# Altium PCB pi_breakout.PcbDoc
Units mm, origin at the board's own origin, x right, y up, seen from the top; angles counter-clockwise.
Board outline 56.1 x 70 mm, 2 copper layers (Top Layer, Bottom Layer); 56 components, 55 nets, 226 pads, 69 vias.
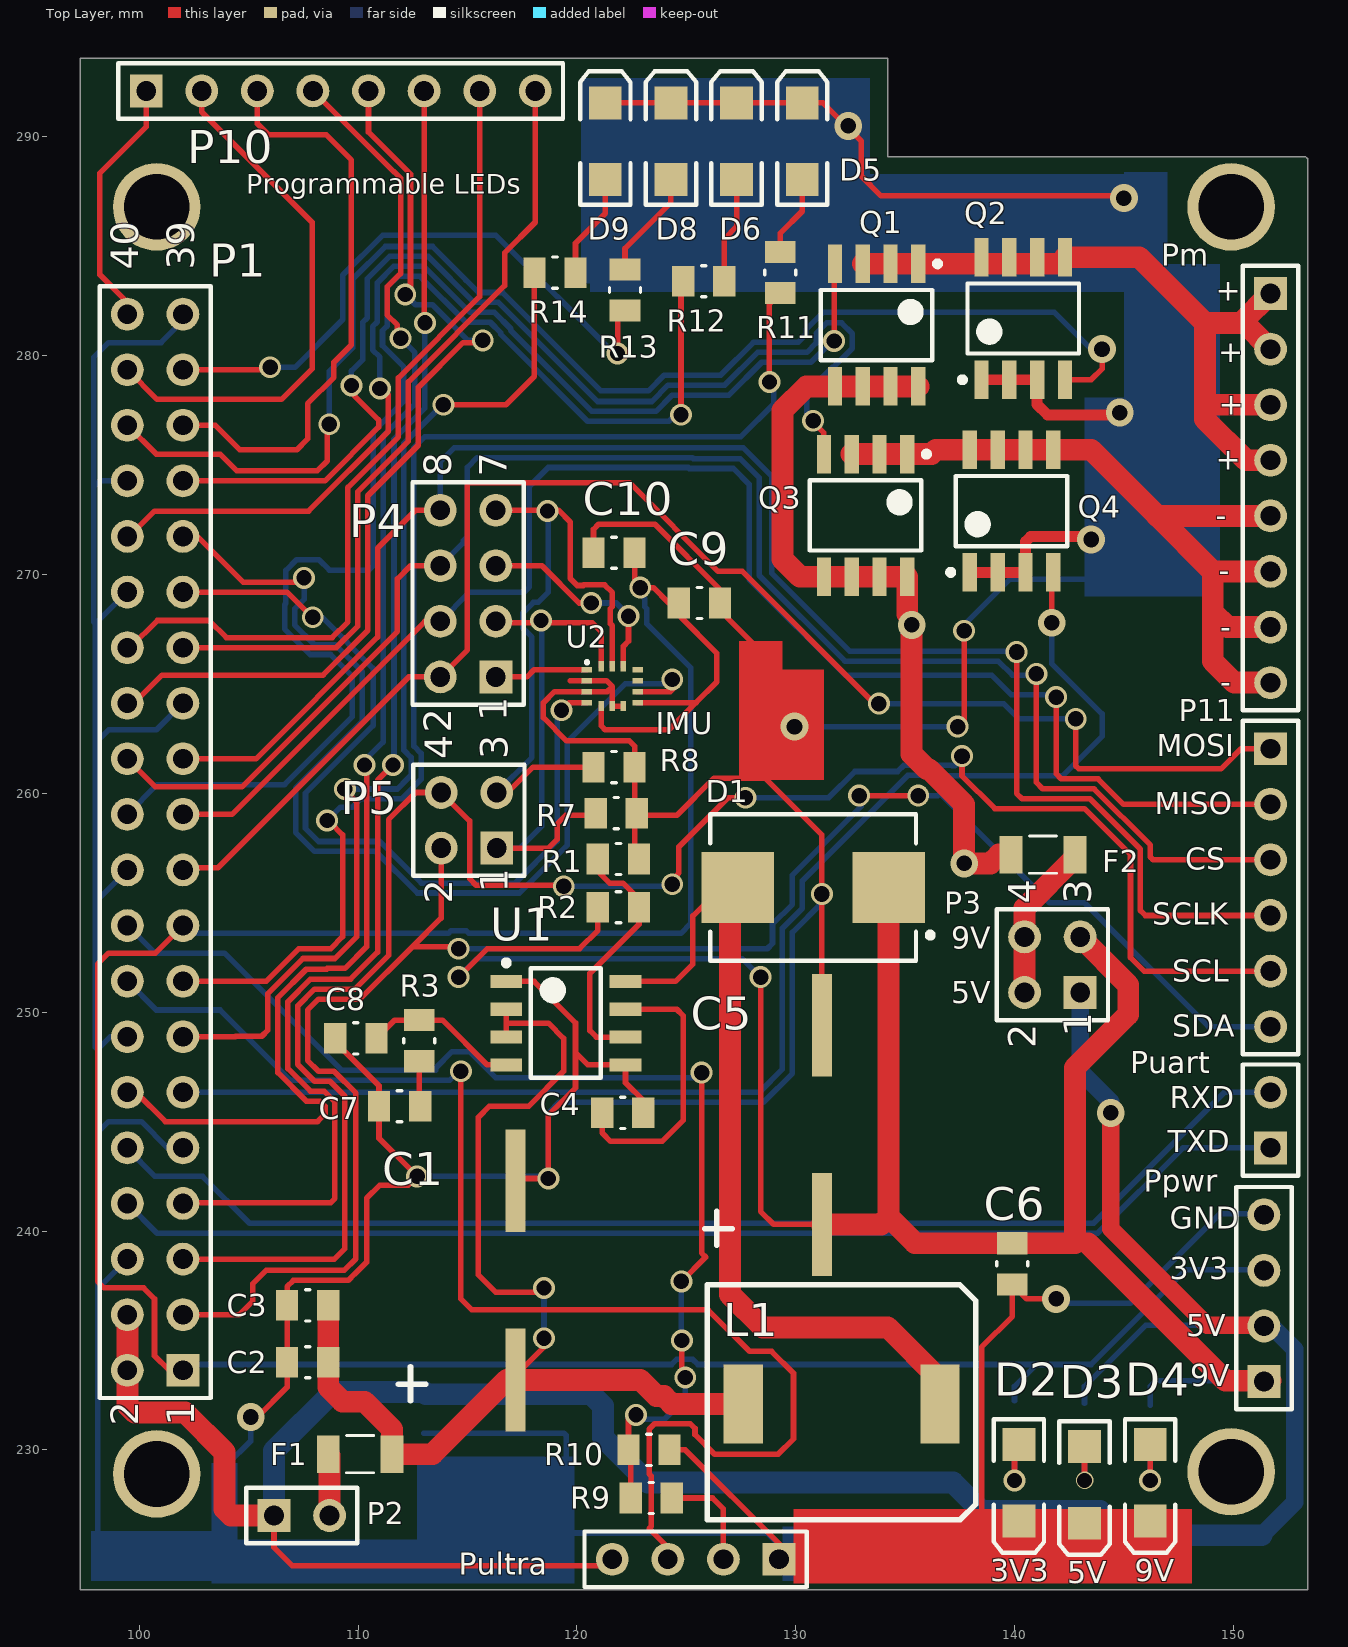
[diagram p0: Top Layer view]
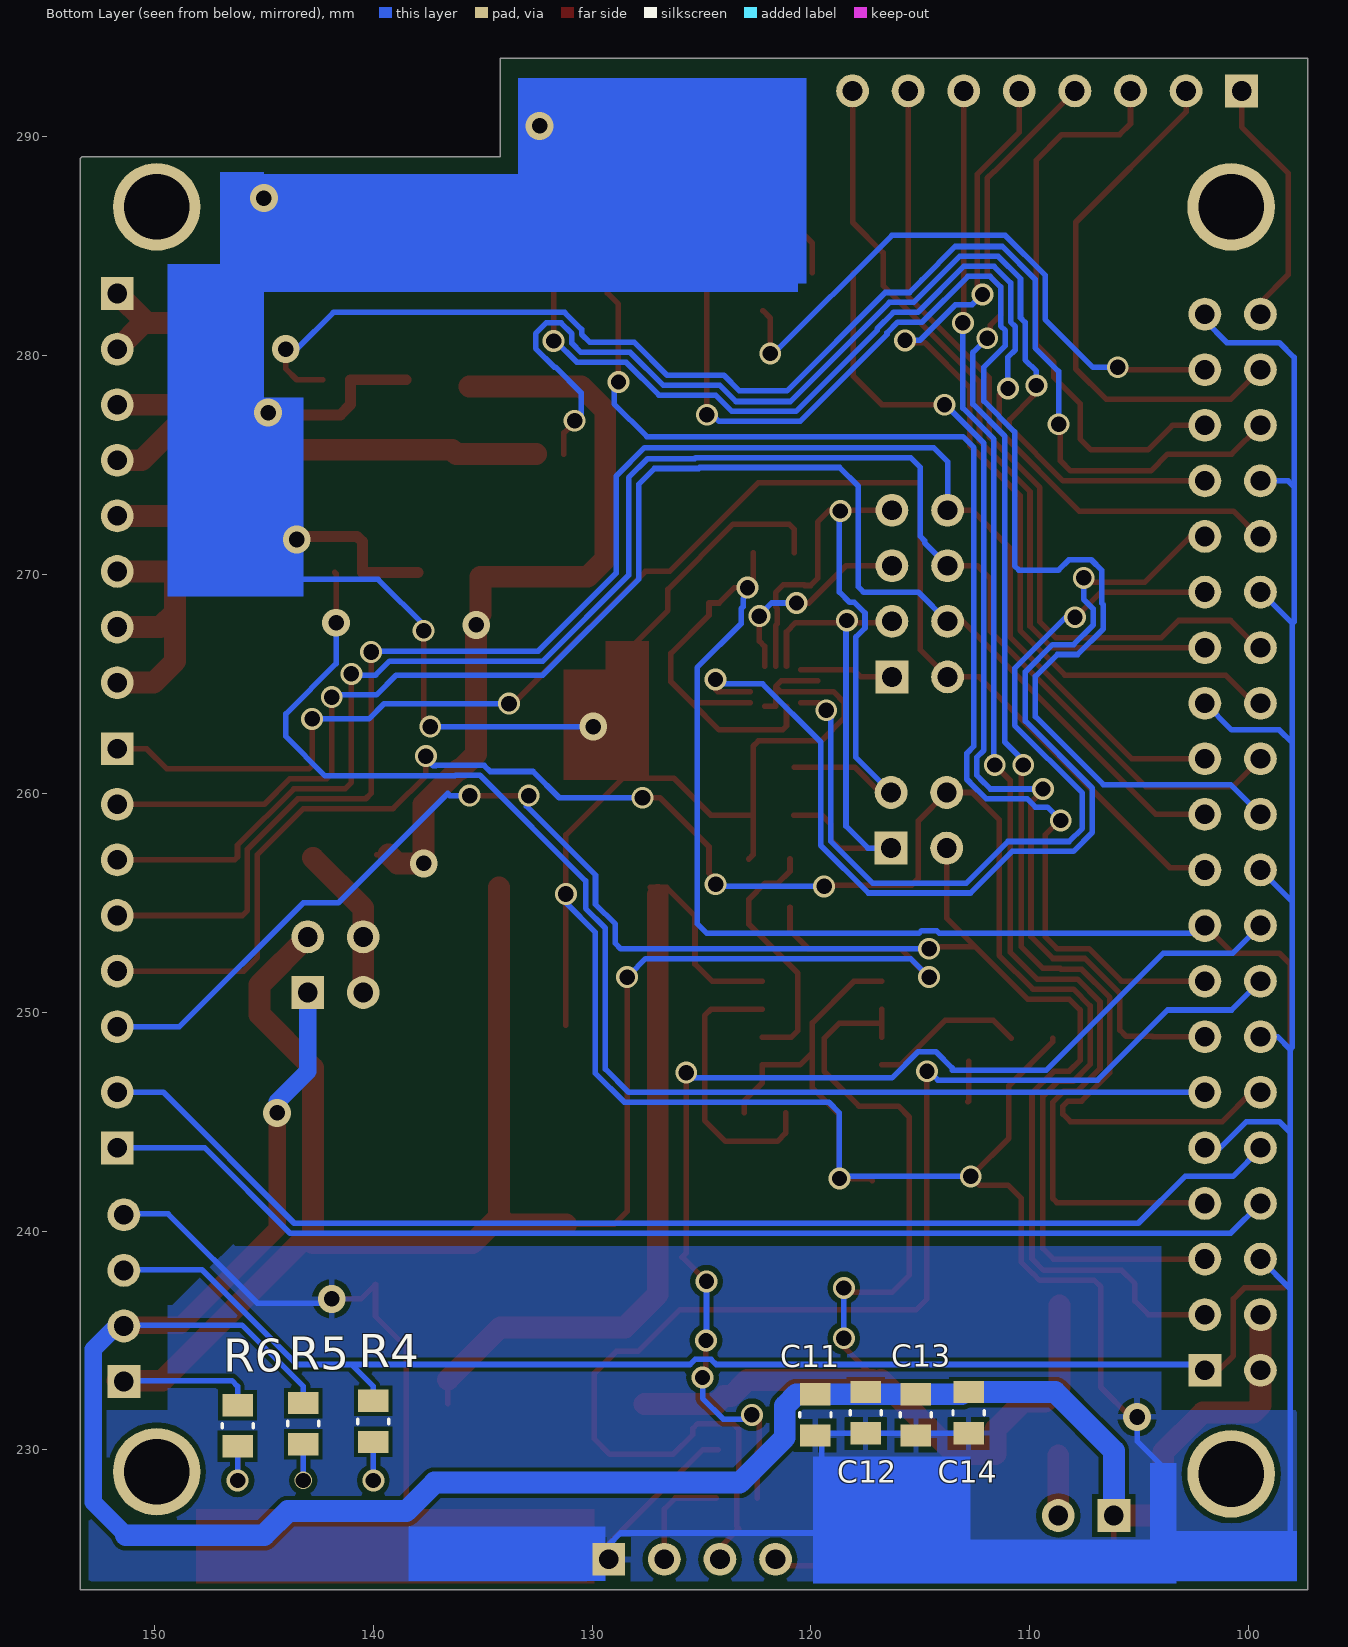
[diagram p1: Bottom Layer view, seen from below]

## Layer stack, top to bottom
Top Solder: solder mask 0.0102, Solder Resist, Dk 3.5
Top Layer: signal copper 0.0356
Dielectric 1: dielectric 0.32, FR-4, Dk 4.8
Bottom Layer: signal copper 0.0356
Bottom Solder: solder mask 0.0102, Solder Resist, Dk 3.5

## Board outline
97.3,293.6 97.3,223.6 153.4,223.6 153.4,289 153.3,289.1 134.2,289.1 134.2,293.6
cut-out: 62.061,252.631

## Design rules (kind name [scope] priority, off if disabled: settings)
Clearance [All] p1: gap=0.2 ignorepadtopadclearanceinfootprint=FALSE except(0: Arc-Hole Track-Hole SMDPad-Hole THPad-Hole Via-Hole Fill-Hole Poly-Hole Region-Hole Text-Hole; 0.254: THPad-THPad THPad-Via THPad-Fill THPad-Poly THPad-Region THPad-Text Via-Via Via-Fill Via-Poly Via-Region Via-Text Fill-Fill Fill-Poly Fill-Region Fill-Text Poly-Poly Poly-Region Poly-Text Region-Region Region-Text Text-Text)
HoleSize [All] p1: absolutevalues=TRUE maxlimit=4 minlimit=0.025 maxpercent=80.000 minpercent=20.000
MinimumSolderMaskSliver [All] p1: minsoldermaskwidth=0.14
PolygonConnect [All] p1: connectstyle=Relief reliefconductorwidth=0.254 reliefentries=4 polygonreliefangle="90 Angle" airgapwidth=0.254
RoomDefinition pi_breakout [InComponentClass('pi_breakout')] p1: confinementstyle=ConfineIn formatcopy=TRUE lockcomponents=FALSE outline 97.3,293.7 153.2,293.7 153.4,293.5 153.4,223.5 97.3,223.5
RoutingVias [All] p1: holewidth=0.711 width=1.27 viastyle="Through Hole" minholewidth=0.7 minwidth=0.7 maxholewidth=4 maxwidth=4
SilkToSilkClearance [All] p1: silktosilkclearance=0.15
SilkToSolderMaskClearance [IsPad] p1: minsilkscreentomaskgap=0.15 clearancetoexposedcopper=TRUE
SolderMaskExpansion [All] p1: expansion=0.102
Width [All] p1: maxlimit=3 minlimit=0.254 preferedwidth=0.254
26 further rules are at their usual default settings.

## Components (designator, comment, footprint, x,y, rotation, side; value= is the part's Value field where it differs from the comment)
C1 "CAP ALUM 470UF RADIAL" "Aluminum Electrolytic Capacitors Radial" 117.2,233.2 r0 top value=470uF
C2 "10uF" 0805 107.7,234 r0 top
C3 "1uF" 0805 107.7,236.6 r0 top
C4 "10nF" 0805 122.1,245.4 r0 top
C5 "CAP ALUM 470UF RADIAL" "Aluminum Electrolytic Capacitors Radial" 131.2,240.3 r0 top value=470uF
C6 "10uF" 0805 139.9,238.5 r90 top
C7 "1nF" 0805 111.9,245.7 r0 top
C8 "470pF" 0805 109.9,248.8 r0 top
C9 "100nF" 0805 125.599,268.699 r0 top
C10 "100nF" 0805 121.7,271 r0 top
C11 "1uF" 0805 119.8,231.6 r90 bottom
C12 "1uF" 0805 117.5,231.7 r90 bottom
C13 "1uF" 0805 115.209,231.6 r90 bottom
C14 "1uF" 0805 112.8,231.7 r90 bottom
D1 "DIODE SCHOTTKY 40V 3A SMC" SMC 130.8,255.7 r180 top
D2 "LED2" 3.2X1.6X1.1 140.2,228.5 r270 top
D3 "LED2" 3.2X1.6X1.1 143.2,228.4 r270 top
D4 "LED2" 3.2X1.6X1.1 146.2,228.5 r270 top
D5 "LED2" 3.2X1.6X1.1 130.3,289.8 r90 top
D6 "LED2" 3.2X1.6X1.1 127.3,289.8 r90 top
D8 "LED2" 3.2X1.6X1.1 124.3,289.8 r90 top
D9 "LED2" 3.2X1.6X1.1 121.3,289.8 r90 top
F1 "Fuse 3A 1206" 1206 110.1,229.8 r0 top
F2 "Fuse 3A 1206" 1206 141.3,257.2 r0 top
L1 "SRU1048-8R2Y" Inductor 132.1,232.1 r0 top value=8.2uH
P1 "Pi Breakout" HDR2X20 102,233.64 r90 top
P2 "Header 2" HDR1X2 106.16,227 r0 top
P3 "Header 2X2" HDR2X2 143,250.9 r90 top
P4 "Header 4X2" HDR2X4 116.3,265.32 r90 top
P5 "Header 2X2" HDR2X2 116.34,257.5 r90 top
P10 "Header 8" HDR1X8 100.32,292.1 r0 top
P11 "Header 6" HDR1X6 151.7,262.04 r270 top
Pm "Header 8" HDR1X8 151.7,282.84 r270 top (schematic designator P?)
Ppwr "Header 4" HDR1X4 151.4,233.12 r90 top
Puart "Header 2" HDR1X2 151.7,243.8 r90 top
Pultra "Header 4" HDR1X4 129.24,225 r180 top
Q1 "N-Channel" "8-SOIC MOSFET" 133.7,281.4 r270 top
Q2 "N-Channel" "8-SOIC MOSFET" 140.4,281.7 r90 top
Q3 "N-Channel" "8-SOIC MOSFET" 133.195,272.7 r270 top
Q4 "N-Channel" "8-SOIC MOSFET" 139.865,272.9 r90 top
R1 "5.1k" 0805 121.9,257 r0 top
R2 "30k" 0805 121.9,254.8 r0 top
R3 "47k" 0805 112.8,248.7 r270 top
R4 "330" 0805 140,231.3 r270 bottom
R5 "330" 0805 143.2,231.2 r270 bottom
R6 "560" 0805 146.2,231.1 r270 bottom
R7 "10k" 0805 121.8,259.1 r0 top
R8 "10k" 0805 121.7,261.2 r0 top
R9 "1k" 0805 123.4,227.8 r0 top
R10 "1.96K" 0805 123.3,230 r0 top value=1.96k
R11 "330" 0805 129.3,283.8 r90 top
R12 "330" 0805 125.8,283.4 r0 top
R13 "330" 0805 122.2,283 r90 top
R14 "330" 0805 119,283.8 r0 top
U1 "REG BOOST ADJ. 5.5A" ICREGBOOSTADJUSTABLE5.5A8SO 119.5,249.5 r0 top
U2 "ACCEL/GYRO I2C/SPI" "IMU 14-LGA" 121.62,264.9 r0 top value=N/A

## Footprints (in the part's own frame and the unit in brackets; to place one, negate y for a bottom-side part, rotate by r counter-clockwise, add the part's x,y. Pads: shape width x height; smd on the part's side, far side on the other; paste and mask are expansions set on the pad)
3.2X1.6X1.1 [mm]
  rect 1.5x1.5 smd: 1(-1.75,0) 2(1.75,0)
  silkscreen extent -2.9,-1.15 3.2,1.15
"8-SOIC MOSFET" [mm]
  rect 1.75x0.65 smd: D(2.8,1.905) D(2.8,-0.635) D(2.8,0.635) D(2.8,-1.905) G(-2.8,-1.905) S(-2.8,1.905) S(-2.8,-0.635) S(-2.8,0.635)
  silkscreen extent -2.92,-2.55 1.6,2.91, body extent -2,-2.55 2,2.55, height 1.7
0805 [mil]
  rect 40x55 smd: 1(-37,0) 2(37,0)
  silkscreen extent -4,-28 4,28
1206 [mm]
  rect 1.05x1.72 smd: 1(-1.46,0) 2(1.46,0)
  silkscreen extent -0.62,-0.85 0.62,0.85
"Aluminum Electrolytic Capacitors Radial" [mm]
  rect 0.9x4.7 smd: 1(0,0) 2(0,9.1)
  silkscreen extent -5.35,-0.95 -4.1,0.6, body extent -6.75,-1.65 6.75,10.85, height 0.25
HDR1X2 [mm] "Connector; Header; 2 Position"
  rect 1.5x1.5 hole 0.9: 1(0,0)
  round 1.5 hole 0.9: 2(2.54,0)
  silkscreen extent -1.27,-1.27 3.81,1.27
HDR1X4 [mm] "Connector; Header; 4 Position"
  rect 1.5x1.5 hole 0.9: 1(0,0)
  round 1.5 hole 0.9: 2(2.54,0) 3(5.08,0) 4(7.62,0)
  silkscreen extent -1.27,-1.27 8.89,1.27
HDR1X6 [mm] "Connector; Header; 6 Position"
  rect 1.5x1.5 hole 0.9: 1(0,0)
  round 1.5 hole 0.9: 2(2.54,0) 3(5.08,0) 4(7.62,0) 5(10.16,0) 6(12.7,0)
  silkscreen extent -1.27,-1.27 13.97,1.27
HDR1X8 [mm] "Connector; Header; 8 Position"
  rect 1.5x1.5 hole 0.9: 1(0,0)
  round 1.5 hole 0.9: 2(2.54,0) 3(5.08,0) 4(7.62,0) 5(10.16,0) 6(12.7,0) 7(15.24,0) 8(17.78,0)
  silkscreen extent -1.27,-1.27 19.05,1.27
HDR2X2 [mm] "Connector; Header; 2x2 Position"
  rect 1.5x1.5 hole 0.9: 1(0,0)
  round 1.5 hole 0.9: 2(0,2.54) 3(2.54,0) 4(2.54,2.54)
  silkscreen extent -1.27,-1.27 3.81,3.81
HDR2X4 [mm] "Connector; Header; 4x2 Position"
  rect 1.5x1.5 hole 0.9: 1(0,0)
  round 1.5 hole 0.9: 2(0,2.54) 3(2.54,0) 4(2.54,2.54) 5(5.08,0) 6(5.08,2.54) 7(7.62,0) 8(7.62,2.54)
  silkscreen extent -1.27,-1.27 8.89,3.81
HDR2X20 [mm] "Connector; Header; 20x2 Position"
  rect 1.5x1.5 hole 0.9: 1(0,0)
  round 1.5 hole 0.9: 2(0,2.54) 3(2.54,0) 4(2.54,2.54) 5(5.08,0) 6(5.08,2.54) 7(7.62,0) 8(7.62,2.54) 9(10.16,0) 10(10.16,2.54) 11(12.7,0) 12(12.7,2.54) 13(15.24,0) 14(15.24,2.54) 15(17.78,0) 16(17.78,2.54) 17(20.32,0) 18(20.32,2.54) 19(22.86,0) 20(22.86,2.54) 21(25.4,0) 22(25.4,2.54) 23(27.94,0) 24(27.94,2.54) 25(30.48,0) 26(30.48,2.54) 27(33.02,0) 28(33.02,2.54) 29(35.56,0) 30(35.56,2.54) 31(38.1,0) 32(38.1,2.54) 33(40.64,0) 34(40.64,2.54) 35(43.18,0) 36(43.18,2.54) 37(45.72,0) 38(45.72,2.54) 39(48.26,0) 40(48.26,2.54)
  silkscreen extent -1.27,-1.27 49.53,3.81
ICREGBOOSTADJUSTABLE5.5A8SO [mm]
  rect 1.45x0.6 smd: AGND(2.725,-1.905) COMP(-2.725,-1.905) EN(-2.725,-0.635) FB(2.725,-0.635) PGND(-2.725,1.905) SS(2.725,0.635) SW(2.725,1.905) VIN(-2.725,0.635)
  silkscreen extent -2.85,-2.5 1.6,2.88, body extent -2,-2.5 2,2.5, height 1.75
"IMU 14-LGA" [mm] "Accelerometer, Gyroscope, Temperature, 6 Axis Sensor I²C, SPI Output"
  rect 0.25x0.475 smd mask+0.05: CS(0.5,0.91) GND(0,-0.91) GND(0.5,-0.91) SCL(0,0.91) SDA(-0.5,0.91) VDDIO(-0.5,-0.91)
  rect 0.475x0.25 smd mask+0.05: INT1(-1.16,-0.75) INT2(1.16,-0.25) NC(1.16,0.25) NC(1.16,0.75) SCx(-1.16,-0.25) SDO(-1.16,0.75) SDx(-1.16,0.25) VDD(1.16,-0.75)
  silkscreen extent -1.17,1.08 -1.15,1.1, body extent -1.5,-1.25 1.5,1.25, height 0.86
Inductor [mil]
  rect 71x142 smd: 1(-177,0) 2(177,0)
  silkscreen extent -242,-208 242,214
SMC [mm] "SMC Standard Package"
  rect 3.3x3.25 smd: 1(-3.45,0) 2(3.45,0)
  silkscreen extent -5.48,-3.35 4.7,3.35, body extent -4.7,-3.31 4.7,3.31, height 2.5

## Part data
C1 C5: library part "CAP ALUM 470UF Aluminum Electrolytic Radial", "470µF 35V Aluminum Electrolytic Capacitors Radial, Can - SMD  5000 Hrs @ 105°C", Package="RADIAL SMD", Rating=35V, Tolerance=20%, Digikey=PCE3464CT-ND, Digikey Link=https://www.digikey.ca/product-detail/en/panasonic-electronic-components/EEV-FK1V471Q/PCE3464CT-ND/396323, MF="Panasonic Electronic Components", MP=EEV-FK1V471Q, Price="1.8 CAD"
C2 C6: library part "CAP 10uF 0805", "CAP CER 10UF 10V X5R 0805", Package=0805, Rating=10V, Tolerance=10%, Digikey=399-4925-1-ND, Digikey Link=https://www.digikey.ca/product-detail/en/kemet/C0805C106K8PACTU/399-4925-1-ND/1090920, MF=KEMET, MP=C0805C106K8PACTU, Price="0.168 CAD"
C3 C11 C12 C13 C14: library part "CAP 1uF 0805", "CAP CER 1UF 50V X7R 0805", Package=0805, Rating=50V, Tolerance=10%, Digikey=1276-1029-1-ND, Digikey Link=https://www.digikey.ca/product-detail/en/samsung-electro-mechanics/CL21B105KBFNNNE/1276-1029-1-ND/3889115, MF="Samsung Electro-Mechanics", MP=CL21B105KBFNNNE, Price="0,172 CAD"
C4: library part "CAP 10nF 0805", "CAP CER 10000PF 50V X7R 0805", Package=0805, Rating=50V, Tolerance=10%, Digikey=311-1136-1-ND, Digikey Link=https://www.digikey.ca/product-detail/en/yageo/CC0805KRX7R9BB103/311-1136-1-ND/303046, MF=Yageo, MP=CC0805KRX7R9BB103, Price="0,1 CAD"
C7: library part "CAP 1nF 0805", "CAP CER 1000PF 50V X7R 0805", Package=0805, Rating=50V, Tolerance=10%, Digikey=311-1127-1-ND, Digikey Link=https://www.digikey.ca/products/en?keywords=311-1127-1-ND, MF=Yageo, MP=CC0805KRX7R9BB102, Price="0.1 CAD"
C8: library part "CAP 470pF 0805", "CAP CER 470PF 50V C0G/NPO 0805", Package=0805, Rating=50V, Tolerance=5%, Digikey=311-1119-1-ND, Digikey Link=https://www.digikey.ca/products/en?keywords=311-1119-1-ND, MF=Yageo, MP=CC0805JRNPO9BN471, Price="0,135 CAD"
C9 C10: library part "CAP 100nF 0805", "CAP CER 0.1UF 50V X7R 0805", Package=0805, Rating=50V, Tolerance=10%, Digikey=311-1140-1-ND, Digikey Link=https://www.digikey.ca/products/en?keywords=311-1140-1-ND, MF=Yageo, MP=CC0805KRX7R9BB104, Price="0,119 CAD"
D1: library part B340-13-F, "Diode Schottky 40V 3A Surface Mount SMC", Package=SMC, Rating="40V 3A", Digikey=B340-FDICT-ND, Digikey Link=https://www.digikey.ca/product-detail/en/diodes-incorporated/B340-13-F/B340-FDICT-ND/768811, MF="Diodes Incorporated", MP=B340-13-F, Price="0.52 CAD"
D2 D3 D4 D5 D6 D8 D9: library part "LED GREEN SMD", "Typical RED, GREEN, YELLOW, AMBER GaAs LED", Package=0603, Rating=2V, Digikey=160-1446-1-ND, Digikey Link=https://www.digikey.ca/products/en?keywords=160-1446-1-ND, MF="Lite-On Inc.", MP=LTST-C191KGKT
F1 F2: "FUSE 3.0A 63VAC/DC SLOW 1206", Rating=3A, Digikey=507-1896-6-ND, Digikey Link=https://www.digikey.ca/product-detail/en/bel-fuse-inc/0685T3000-01/507-1896-6-ND/4968212, MF="Bel Fuse Inc.", MP=0685T3000-01
L1: "FIXED IND 8.2UH 4.6A 15 MOHM SMD", Package=Nonstandard, ComponentLink1Description=digikey, ComponentLink1URL=https://www.digikey.ca/en/products/detail/bourns-inc/SRU1048-8R2Y/2352912, Digikey=SRU1048-8R2YCT-ND, Digikey Link=https://www.digikey.ca/en/products/detail/bourns-inc/SRU1048-8R2Y/2352912, MF="Bourns Inc.", MP=SRU1048-8R2Y, Price=None
P1: library part "Header 20X2", "Header, 20-Pin, Dual row", LatestRevisionDate=17-Jul-2002, LatestRevisionNote="Re-released for DXP Platform.", Publisher="Altium Limited"
P2 Puart: "Header, 2-Pin", LatestRevisionDate=17-Jul-2002, LatestRevisionNote="Re-released for DXP Platform.", Publisher="Altium Limited"
P3 P5: "Header, 2-Pin, Dual row", LatestRevisionDate=17-Jul-2002, LatestRevisionNote="Re-released for DXP Platform.", Publisher="Altium Limited"
P4: "Header, 4-Pin, Dual row", LatestRevisionDate=17-Jul-2002, LatestRevisionNote="Re-released for DXP Platform.", Publisher="Altium Limited"
P10 Pm: "Header, 8-Pin", LatestRevisionDate=17-Jul-2002, LatestRevisionNote="Re-released for DXP Platform.", Publisher="Altium Limited"
P11: "Header, 6-Pin", LatestRevisionDate=17-Jul-2002, LatestRevisionNote="Re-released for DXP Platform.", Publisher="Altium Limited"
Ppwr Pultra: "Header, 4-Pin", LatestRevisionDate=17-Jul-2002, LatestRevisionNote="Re-released for DXP Platform.", Publisher="Altium Limited"
Q1 Q2 Q3 Q4: library part "MOSFET N Channel 8-SOIC", "MOSFET N-CH 30V 18.5A 8-SOIC", Package=8-SOIC, Rating=30V, Digikey=FDS8813NZCT-ND, Digikey Link=https://www.digikey.ca/product-detail/en/on-semiconductor/FDS8813NZ/FDS8813NZCT-ND/1626932, MF="ON Semiconductor", MP=FDS8813NZ, Price="1.727 CAD"
R1: library part "RES 5.1k 0805", "RES SMD 5.1K OHM 1% 1/8W 0805", Package=0805, Rating=0.125W, Tolerance=1%, Digikey=311-5.10KCRDKR-ND, Digikey Link=https://www.digikey.ca/products/en?keywords=311-5.10KCRDKR-ND, MF=Yageo, MP=RC0805FR-075K1L, Price="0.061 CAD"
R2: library part "RES 30k 0805", "RES SMD 30K OHM 1% 1/8W 0805", Package=0805, Rating=0.125W, Tolerance=1%, Digikey=311-30.0KCRDKR-ND, Digikey Link=https://www.digikey.ca/products/en?keywords=311-30.0KCRDKR-ND, MF=Yageo, MP=RC0805FR-0730KL, Price="0.061 CAD"
R3: library part "RES 47k 0805", "RES SMD 47K OHM 1% 1/8W 0805", Package=0805, Rating=0.125W, Tolerance=1%, Digikey=311-47.0KCRCT-ND, Digikey Link=https://www.digikey.ca/product-detail/en/yageo/RC0805FR-0747KL/311-47.0KCRCT-ND/730920, MF=Yageo, MP=RC0805FR-0747KL, Price="0.061 CAD"
R4 R5 R11 R12 R13 R14: library part "RES 330 0805", "RES SMD 330 OHM 1% 1/8W 0805", Package=0805, Rating=0.125W, Digikey=311-330CRCT-ND, Digikey Link=https://www.digikey.ca/products/en?keywords=311-330CRCT-ND, MF=Yageo, MP=RC0805FR-07330RL, Price="0.061 CAD"
R6: library part "RES 560 0805", "RES 560 OHM 1% 1/8W 0805", Package=0805, Rating=0.125W, Tolerance=1%, Digikey=RMCF0805FT560RCT-ND, Digikey Link=https://www.digikey.ca/product-detail/en/stackpole-electronics-inc/RMCF0805FT560R/RMCF0805FT560RCT-ND/2418431, MF="Stackpole Electronics Inc", MP=RMCF0805FT560R, Price="0.15 CAD"
R7 R8: library part "RES 10k 0805", "RES SMD 10K OHM 1% 1/8W 0805", Package=0805, Rating=0.125W, Tolerance=1%, Digikey=311-10.0KCRCT-ND, Digikey Link=https://www.digikey.ca/products/en?keywords=311-10.0KCRCT-ND, MF=Yageo, MP=RC0805FR-0710KL, Price="0.061 CAD"
R9: library part "RES 1k 0805", "RES SMD 1K OHM 5% 1/8W 0805", Package=0805, Rating=0.125W, Tolerance=5%, Digikey=311-1.0KARCT-ND, Digikey Link=https://www.digikey.ca/products/en?keywords=311-1.0KARCT-ND, MF=Yageo, MP=RC0805JR-071KL, Price="0.048 CAD"
R10: library part "RES 1.96k 0805", "RES SMD 1.96K OHM 1% 1/8W 0805", Package=0805, Rating=0.125W, Tolerance=1%, Digikey=P1.96KCCT-ND, Digikey Link=https://www.digikey.ca/product-detail/en/panasonic-electronic-components/ERJ-6ENF1961V/P1.96KCCT-ND/119041, MF="Panasonic Electronic Components", MP=ERJ-6ENF1961V, Price="0.15 CAD"
U1: library part "REG BOOST ADJUSTABLE 5.5A 8SO", "Boost Switching Regulator IC Positive Adjustable 2.7V 1 Output 5.5A (Switch) 8-SOIC (0.154\", 3.90mm Width) Exposed Pad", Package=8SOIC, Digikey=PAM2423AECADJRDICT-ND, Digikey Link=https://www.digikey.ca/product-detail/en/diodes-incorporated/PAM2423AECADJR/PAM2423AECADJRDICT-ND/4505224, MF="Diodes Incorporated", MP=PAM2423AECADJR, Price="1.68 CAD"
U2: library part "IMU 14LGA", "Accelerometer, Gyroscope, Temperature, 6 Axis Sensor I²C, SPI Output", Package=14-LGA, Rating=N/A, Digikey=497-16705-1-ND, Digikey Link=https://www.digikey.ca/product-detail/en/stmicroelectronics/LSM6DSLTR/497-16705-1-ND/6192805, MF=STMicroelectronics, MP=LSM6DSLTR, Price="5.407 CAD", Tolerance=N/A

## Free pads (board coordinates)
  round 4 hole 3: 5(100.8,228.9) 5(100.8,286.8) 5(149.9,229) 5(149.9,286.8)

## Via types
v1: diameter 1, hole 0.7, Top Layer to Bottom Layer, tented both sides, 38 vias
v2: diameter 1, hole 0.711, Top Layer to Bottom Layer, tented both sides, 16 vias
v3: diameter 1.27, hole 0.711, Top Layer to Bottom Layer, 12 vias
v4: diameter 1, hole 0.7, Top Layer to Bottom Layer, 2 vias
v5: diameter 0.8, hole 0.7, Top Layer to Bottom Layer, 1 vias

## Nets (pads, with @x,y where several pads share a name; then routed paths per layer and width w, separated by ;. In a path a pad name is that pad's centre, name@x,y a point inside that pad or via, vN(x,y) a via of type N, cw(c..) or ccw(c..) an arc to the next point about the centre after c; other vN are vias at no path point)
3V3: C9.1 C10.2 P1.1 P1.17 Ppwr.3 R4.1 U2.VDD U2.VDDIO | length 137.9
  Top Layer w0.254: P1.1 101.36,233.64 100.7,234.3 100.7,236.9 100.2,237.4 98.4,237.4 98.1,237.7 98.1,252.2 98.6,252.7 100.74,252.7 P1.17 ; U2.VDDIO 121.12,263.08 121.3,262.9 124.2,262.9 125.45,264.15 ; C10.2 122.64,269.52 122.761,269.399 v1(122.9,269.399) 123.501,269.399 124.201,268.699 C9.1 124.66,268.14 126.4,266.4 126.4,265.1 125.45,264.15 ; U2.VDD 125.45,264.15
  Bottom Layer w0.254: P1.1 102.26,233.9 124.33,233.9 124.563,234.133 125.297,234.133 125.53,233.9 141,233.9 ; P1.17@102,253.923 P1.17 102.36,253.6 114.13,253.6 114.257,253.727 114.943,253.727 115.07,253.6 124.754,253.6 125.2,254.046 125.2,265.744 123.187,267.757 123.187,268.443 123.1,268.53 123.1,268.9 v1@122.8,269.2 ; R4.1 140,232.9 141,233.9 ; Ppwr.3@151.7,238.24 147.84,238.24 143.5,233.9 141,233.9
5V: C11.2 C12.2 C13.2 C14.2 P1.2 P1.4 P2.1 P3.1 Ppwr.2 Pultra.4 R5.1 | length 125.8
  Top Layer w0.254: P2.1 106.16,225.54 107,224.7 121.32,224.7 Pultra.4
  Top Layer w0.8: v3@144.4,245 144.4,240.1 148.8,235.7 Ppwr.2@151.7,235.7
  Top Layer w1: P1.4 P1.2 99.46,232.04 99.8,231.7 102.1,231.7 103.9,229.9 103.9,227.3 104.2,227 P2.1
  Bottom Layer w0.254: C14.2@113.009,232.64 C14.2@113.109,232.54 ; R5.1 143.2,232.9 146,235.7 Ppwr.2@151.7,235.7 ; v3(144.4,245.4) v3@144.4,245.9
  Bottom Layer w0.8: P3.1 143,247.3 v3@144.4,245.9 ; 151.3,226.1 152.8,227.6 152.8,234.6 Ppwr.2@151.7,235.7
  Bottom Layer w1: P2.1 106.16,229.96 108.84,232.64 C14.2@113.009,232.64 ; C14.2@113.109,232.54 C13.2 119.509,232.54 120.66,232.54 121.2,232 121.2,230.56 123.26,228.5 137.2,228.5 138.5,227.2 143.9,227.2 145,226.1 151.3,226.1
9V: C5.1 C6.2 D1.1 P3.3 Ppwr.1 R2.1 R6.1 | length 96.7
  Top Layer w0.254: v1@114.8,251.8 115.908,252.908 120.125,252.908 120.96,253.743 R2.1 ; v2(128.4,251.6) 128.4,240.9 129,240.3 C5.1
  Top Layer w1: C5.1 133.9,240.3 134.25,240.65 ; D1.1 134.25,240.65 ; P3.3 145.2,251.24 145.2,249.9 142.76,247.46 142.76,239.44 C6.2 135.46,239.44 134.25,240.65 ; 143.36,239.44 149.64,233.16 Ppwr.1@151.7,233.16
  Bottom Layer w0.254: v1(114.6,251.6) 115.446,252.446 127.554,252.446 v2@128.3,251.7 ; R6.1 146.2,232.9 146.46,233.16 Ppwr.1@151.7,233.16
G0_ID_SD: P1.27 P10.8 | length 36.2
  Top Layer w0.254: P1.27 109.006,266.66 109.992,267.646 109.992,273.789 112.3,276.097 112.3,278.8 116.7,283.2 116.7,284.7 118.1,286.1 P10.8
G1_ID_SC: P1.28 P10.7 | length 38
  Top Layer w0.254: P1.28 99.59,266.66 100.83,267.9 103.2,267.9 103.986,267.114 108.818,267.114 109.538,267.834 109.538,273.977 111.846,276.285 111.846,278.988 115.56,282.702 P10.7
G2_SDA: P1.3 P5.2 P11.6 | length 81.3
  Top Layer w0.254: P1.3 104.58,236.18 105.2,236.8 105.2,237.6 105.8,238.2 109.366,238.2 109.9,238.734 109.9,246.3 108.9,247.3 108.2,247.3 107.7,247.8 107.7,250.1 108.2,250.6 110.1,250.6 112.5,253 ; P5.2 113.8,254.3 112.5,253 ; v1@114.5,253 112.5,253 ; v2(132.9,259.9) v2@135.8,259.9
  Bottom Layer w0.254: v1(114.6,252.9) 128.7,252.9 128.941,253.141 128.941,254.025 129.846,254.93 129.846,256.26 133,259.414 v2@133,259.746 ; v2(135.6,259.9) 136.5,259.9 136.6,260 141.6,255 143.2,255 148.86,249.34 P11.6
G3_SCL: P1.5 P5.4 P11.5 | length 85.6
  Top Layer w0.254: P1.5 108.92,238.72 109.4,239.2 109.4,246.158 108.712,246.846 108.012,246.846 107.246,247.612 107.246,250.288 108.012,251.054 109.854,251.054 111.4,252.6 111.4,258.8 112.64,260.04 P5.4 115.1,258.74 115.1,256.1 115.4,255.8 v2@119.16,255.8 ; v2@124.2,255.9 124.66,256.36 124.66,257.56 126.9,259.8 v2(127.7,259.8) ; v2(137.6,261.7) 137.6,260.8 139.1,259.3 143.2,259.3 145.3,257.2 145.3,252.5 145.92,251.88 P11.5
  Bottom Layer w0.254: v2(119.4,255.746) v2@124.246,255.746 ; v2(127.7,259.8) 131.503,259.8 132.703,261 134.658,261 134.939,261.281 137.119,261.281 137.146,261.254 137.274,261.254 v2@137.6,261.58
  other v2: 124.36,255.846
G4_GPCLK0: P1.7 P10.6 | length 62.5
  Top Layer w0.254: P1.7 102.04,241.3 108.76,241.3 108.946,241.486 108.946,245.894 108.448,246.392 107.824,246.392 106.792,247.424 106.792,250.476 107.824,251.508 109.666,251.508 110.9,252.742 110.9,260.6 v1(111.6,261.3) ; v1@113.02,281.6 P10.6
  Bottom Layer w0.254: v1(111.6,261.3) 111.646,261.346 111.646,276.188 113.06,277.602 v1(113.06,281.5)
G5_GPIO: P1.29 U2.INT1 | length 39.1
  Top Layer w0.254: P1.29 106.745,269.2 v1@107.8,268.145 ; v1(119.3,263.8) 119.65,264.15 U2.INT1
  Bottom Layer w0.254: v1(107.934,268.05) 108.35,268.05 110.692,265.708 110.692,263.1 107.6,260.008 107.6,258.4 108.2,257.8 111,257.8 112.9,255.9 117.186,255.9 119.1,257.814 v1@119.1,263.714
G6_GPIO: P1.31 U2.INT2 | length 48.1
  Top Layer w0.254: P1.31 102.66,271.74 104.746,269.654 107.1,269.654 v1@107.246,269.8 ; U2.INT2 124.27,264.65 v1@124.5,264.88
  Bottom Layer w0.254: v1(107.534,269.85) 107.534,268.864 107.1,268.43 107.1,267.7 108,266.8 108.958,266.8 110.2,265.558 110.2,263.3 107.146,260.246 107.146,258.212 108.012,257.346 110.812,257.346 112.712,255.446 117.374,255.446 119.554,257.626 119.554,262.346 122.208,265 124.16,265 v1(124.36,265.2)
G7_CE1: P1.26 P10.5 | length 42.7
  Top Layer w0.254: P1.26 99.77,264.12 101.05,265.4 108.4,265.4 110.446,267.446 110.446,273.601 112.754,275.909 112.754,278.554 114.8,280.6 115.6,280.6 v1(115.7,280.7) ; P10.5@110.446,292.066 P10.5 110.48,290.22 112.4,288.3 112.4,282.98 v1@112.32,282.9
  Bottom Layer w0.254: v1(112.16,282.8) 112.633,282.327 113.403,282.327 115.03,280.7 v1(115.7,280.7)
G8_CE0: P1.24 P4.6 P11.3 | length 75.9
  Top Layer w0.254: P1.24@99.68,261.58 P1.24 100.74,260.3 104.7,260.3 111.8,267.4 111.8,269.8 112.4,270.4 P4.6 ; v2(141,265.46) 141,260.5 141.292,260.208 143.634,260.208 146.208,257.634 146.208,257.092 146.34,256.96 P11.3
  Bottom Layer w0.254: P4.6 114.8,271.44 114.8,271.54 115,271.74 115,274.9 115.446,275.346 125.274,275.346 125.32,275.3 127.458,275.3 128.333,274.425 128.333,269.967 132.254,266.046 139.254,266.046 139.9,265.4 v2@140.9,265.4
G9_MISO: P1.21 P4.4 P11.2 | length 69.9
  Top Layer w0.254: P1.21 104.24,259.04 113.06,267.86 P4.4 ; v2(141.9,264.4) 141.9,260.9 142.138,260.662 143.822,260.662 144.984,259.5 P11.2
  Bottom Layer w0.254: P4.4 115.1,269.2 117.6,269.2 117.833,269.433 117.833,274.033 118.692,274.892 125.086,274.892 125.132,274.846 127.154,274.846 127.879,274.121 127.879,269.779 132.258,265.4 138.954,265.4 139.854,264.5 v2@141.9,264.5
G10_MOSI: P1.19 P4.2 P11.1 | length 68
  Top Layer w0.254: P1.19@102.3,256.5 P1.19 102.1,256.6 103.6,256.6 112.32,265.32 P4.2 115,266.56 115,274.2 122.4,274.2 126.46,270.14 127.564,270.14 v2@133.404,264.3 ; v2(142.8,263.4) 142.8,261.26 142.944,261.116 149.436,261.116 150.36,262.04 P11.1
  Bottom Layer w0.254: v2(133.8,264.1) 139.5,264.1 140.2,263.4 v2@142.446,263.4
G11_SCLK: P1.23 P4.8 P11.4 | length 75.8
  Top Layer w0.254: P1.23 105.338,261.58 110.9,267.142 110.9,271.2 112.64,272.94 P4.8 ; v2(140.1,266.46) 140.1,260 140.346,259.754 143.446,259.754 145.754,257.446 145.754,254.646 145.98,254.42 P11.4
  Bottom Layer w0.254: P4.8 113.76,275.16 114.4,275.8 127.6,275.8 128.9,274.5 128.9,270.064 132.464,266.5 v2@139.8,266.5
G12_PWM0: P1.32 Q1.G | length 49.7
  Top Layer w0.254: P1.32 99.54,271.74 100.7,272.9 107.746,272.9 111.392,276.546 111.392,278.208 v1@111.2,278.4 ; v1(131.76,280.673) 131.76,284.165 Q1.G
  Bottom Layer w0.254: v1(111,278.5) 111,279.934 110.665,280.269 110.665,281.331 110.879,281.545 110.879,283.331 111.629,284.081 113.021,284.081 115.121,281.981 116.231,281.981 116.981,281.231 116.981,281.161 120.688,277.454 123.614,277.454 124.36,278.2 126.948,278.2 128.448,279.7 130.7,279.7 v1@131.7,280.7
G13_PWM1: P1.33 Q3.G | length 51.1
  Top Layer w0.254: P1.33 108.484,274.28 110.938,276.734 110.938,277.062 109.8,278.2 v1@109.8,278.5 ; v1(130.8,277.03) 130.8,276.96 131.29,276.47 Q3.G
  Bottom Layer w0.254: v1(109.7,278.64) 109.7,279.3 110.211,279.811 110.211,281.519 110.425,281.733 110.425,283.519 111.441,284.535 113.209,284.535 115.309,282.435 116.419,282.435 120.946,277.908 123.426,277.908 124.172,278.654 126.76,278.654 128.26,280.154 130.512,280.154 130.933,280.575 130.933,281.016 131.417,281.5 132.103,281.5 132.587,281.016 132.587,280.33 131.733,279.476 131.676,279.476 130.5,278.3 v1@130.5,277.2
G14_UART_TXD: P1.8 Puart.1 | length 54.5
  Bottom Layer w0.254: P1.8@99.46,241.14 P1.8 100.82,239.9 143.8,239.9 147.7,243.8 Puart.1
G15_UART_RXD: P1.10 Puart.2 | length 56.2
  Bottom Layer w0.254: P1.10 99.46,243.76 100.72,242.5 102.9,242.5 105.046,240.354 143.612,240.354 149.598,246.34 Puart.2
G16_GPIO: P1.36 Q2.G | length 61.5
  Top Layer w0.254: P1.36 100.78,275.5 103.7,275.5 104.466,274.734 108.134,274.734 108.6,275.2 v1@108.6,276.734 ; Q2.G 143.5,278.9 144,279.4 v3(144,280.3)
  Bottom Layer w0.254: v1(108.684,276.87) 108.684,279.284 109.757,280.357 109.757,283.493 111.253,284.989 113.411,284.989 114.933,283.467 114.933,283.453 115.497,282.889 116.607,282.889 121.1,278.396 123.272,278.396 123.984,279.108 126.572,279.108 128.072,280.608 130.108,280.608 130.479,280.979 130.479,281.204 131.256,281.981 141.819,281.981 143.5,280.3 v3(144,280.3)
G17_GPIO: P1.11 Q4.G | length 61.7
  Top Layer w0.254: v3(141.7,267.8) 141.7,270.03 Q4.G
  Bottom Layer w0.254: P1.11 128.34,246.34 129.395,247.395 129.395,253.837 130.3,254.742 130.3,256 135.127,260.827 136.243,260.827 136.27,260.8 142.2,260.8 144,262.6 144,263.63 141.7,265.93 v3(141.7,267.8)
G18_PCM_CLK: P1.12 P10.4 | length 63.5
  Top Layer w0.254: P1.12 99.86,246.34 101.2,245 108.148,245 108.492,245.344 108.492,245.706 108.26,245.938 107.636,245.938 106.338,247.236 106.338,250.664 107.636,251.962 108.562,251.962 108.6,252 109.4,252 110.4,253 110.4,261.2 v1(110.3,261.3) ; P10.4 111.64,288.4 111.658,288.4 111.946,288.112 111.946,283.756 111.333,283.143 111.333,281.867 111.8,281.4 v1@111.8,281.1
  Bottom Layer w0.254: v1(110.3,261.3) 110.3,261.5 111.146,262.346 111.146,276.33 112.6,277.784 112.6,280.146 v1(111.946,280.8)
G19_PCM_FS: P1.35 P10.3 | length 26.4
  Top Layer w0.254: P1.35 103.48,276.82 104.6,275.7 107.2,275.7 107.7,276.2 107.7,277.81 108.9,279.01 108.9,279.7 109.7,280.5 109.7,288.94 108.54,290.1 105.9,290.1 105.4,290.6 P10.3
G20_PCM_DIN: P1.38 P10.2 | length 24.4
  Top Layer w0.254: P1.38 100.82,278 106.5,278 107.9,279.4 107.9,286.1 102.86,291.14 P10.2
G21_PCM_DOUT: P1.40 P10.1 | length 11.6
  Top Layer w0.254: P1.40 99.46,282.44 98.2,283.7 98.2,288.34 100.32,290.46 P10.1
G22_GPIO: P1.15 R11.1 | length 56.2
  Top Layer w0.254: P1.15 105.81,251.42 107.298,252.908 108.758,252.908 109.3,253.45 109.3,258.1 v1@108.712,258.688 ; v1(128.8,278.8) 128.8,282.36 R11.1
  Bottom Layer w0.254: v1(108.588,258.76) 109.201,259.373 109.743,259.373 110.116,259.746 111.988,259.746 112.723,260.481 112.723,260.486 112.881,260.644 112.881,261.831 112.554,262.158 112.554,275.8 113.054,276.3 127.5,276.3 129,277.8 v1@129,278.5
G23_GPIO: P1.16 Pultra.3 | length 61.2
  Top Layer w0.254: P1.16 P1.16@99.46,251.46 ; v1(114.7,247.3) 114.7,236.9 115.2,236.4 126,236.4 127.9,234.5 128.9,234.5 129.9,233.5 129.9,230.5 129.2,229.8 126.3,229.8 125.4,230.7 125.4,230.98 125.18,231.2 123.56,231.2 123.3,230.94 123.3,228.9 123.4,228.8 123.4,226.5 123.3,226.4 124.16,225.54 Pultra.3
  Bottom Layer w0.254: P1.16 100.78,250.1 103.7,250.1 106.9,246.9 114.2,246.9 v1@114.5,247.2
G24_GPIO: P1.18 R9.1 R10.1 | length 53
  Top Layer w0.254: R9.1 122.46,229.9 R10.1 122.36,231.56 122.4,231.6 v1(122.7,231.6) ; v1(124.775,237.7) 125.875,238.8 125.9,238.8 125.7,239 v2(125.7,247.236) ; v1(124.8,235) 124.8,233.46 v1(124.954,233.306)
  Bottom Layer w0.254: P1.18 100.72,252.7 103.9,252.7 109.246,247.354 113.554,247.354 113.554,247.454 114.3,248.2 115.1,248.2 116.3,247 125.7,247 v2@125.9,247.2 ; v1@122.6,231.4 124,231.4 124.954,232.354 v1(124.954,233.306) ; v1@124.775,234.615 v1(124.775,237.7)
G25_GPIO: P1.22 R12.1 | length 61.6
  Top Layer w0.254: P1.22 P1.22@99.54,259.04 ; v1(124.76,277.3) 124.76,283.3 R12.1
  Bottom Layer w0.254: P1.22 100.82,260.4 106.642,260.4 109.746,263.504 109.746,265.342 108.742,266.346 107.812,266.346 106.646,267.512 106.646,268.618 106.707,268.679 106.707,270.193 107.191,270.677 108.211,270.677 108.688,270.2 110.5,270.2 110.692,270.392 110.692,276.518 112.1,277.926 112.1,279.476 111.119,280.457 111.119,281.143 111.333,281.357 111.333,283.143 111.817,283.627 112.833,283.627 114.933,281.527 116.043,281.527 116.527,281.043 116.527,280.973 120.5,277 124.2,277 v1@124.6,277.4
G26_GPIO: P1.37 R13.1 | length 27.9
  Top Layer w0.254: P1.37 v1@106,279.36 ; v1(121.86,280.1) 121.86,281.72 R13.1
  Bottom Layer w0.254: v1(105.984,279.47) 107.113,279.47 109.303,281.66 109.303,283.681 111.122,285.5 116.3,285.5 v1@121.8,280
G27_GPIO: P1.13 R14.1 | length 48.1
  Top Layer w0.254: P1.13 104.385,248.88 104.405,248.9 105.6,248.9 105.884,249.184 105.884,250.852 107.486,252.454 108.946,252.454 109.946,253.454 109.946,259.594 v1@109.5,260.04 ; v1(113.9,277.76) 116.76,277.76 118.06,279.06 R14.1
  Bottom Layer w0.254: v1(109.4,260.2) 111.8,260.2 112.269,260.669 112.269,260.674 112.427,260.832 112.427,261.643 112.1,261.97 112.1,276 v1@113.88,277.78
GND: C1.2 C2.1 C3.1 C4.2 C5.2 C6.1 C7.1 C8.1 C9.2 C10.1 C11.1 C12.1 C13.1 C14.1 D2.2 D3.2 D4.2 D5.2 D6.2 D8.2 D9.2 P1.6 P1.9 P1.14 P1.20 P1.25 P1.30 P1.34 P1.39 Ppwr.4 Pultra.1 Q2.S Q4.S R1.2 R7.2 R8.2 R10.2 U1.AGND U1.PGND U2.GND U2.SCx U2.SDx | length 364.7
  Top Layer w0.254: v3(105.1,231.5) 105.4,231.5 106.76,232.86 C2.1 C3.1 106.76,237.46 107.046,237.746 109.554,237.746 109.858,238.05 109.875,238.05 110.4,238.575 110.4,241.5 111,242.1 112.3,242.1 v1(112.7,242.5) ; C8.1 108.96,248.64 110.96,246.64 C7.1 110.96,244.24 v1@112.6,242.6 ; U1.PGND 118.047,251.405 119.94,249.512 119.94,248.16 ; C1.2 117.3,242.4 v1(118.7,242.4) 118.7,245.3 119.94,246.54 119.94,248.16 ; 119.7,265.15 U2.SDx 121.35,265.15 121.62,264.88 ; C10.1 120.76,272.06 121,272.3 123.56,272.3 126.539,269.32 C9.2 126.539,268.361 128.6,266.3 128.6,260.7 ; D9.2 D8.2 D6.2 D5.2 131.25,291.55 133,289.8 133,288.2 133.9,287.3 v3@144.6,287.3 ; U2.GND@122.12,263.99 121.62,263.99 121.62,264.88 ; R7.2@122.661,259 124.571,259 126.271,260.7 128.6,260.7 ; R1.2 122.64,257.2 R8.2 122.64,262.16 122.4,262.4 119.53,262.4 118.473,263.457 118.473,264.143 118.98,264.65 U2.SCx 121.39,264.65 121.62,264.88 ; C4.2 123.04,245.96 122.225,246.775 U1.AGND 120.505,247.595 119.94,248.16 ; R10.2 124.954,230 129.24,225.714 Pultra.1 135.5,225 137.25,226.75 138.5,226.75 ; C5.2 v2@131.2,255.1 ; v2(131.2,255.4) 131.2,258.1 128.6,260.7 ; v2@137.5,263.08 137.7,263.28 v2(137.7,267.432) ; v3(141.9,236.9) 140.56,236.9 C6.1 139.9,236.1 138.5,234.7 138.5,226.75 ; D4.2 D2.2 138.5,226.75
  Top Layer w0.5: Q4.S@137.96,270.1 139.23,270.1 140.5,270.1 140.5,271.5 140.74,271.74 v3@143.06,271.74 ; Q2.S@138.495,278.9 139.765,278.9 141.035,278.9 141.035,277.765 141.5,277.3 v3@144.9,277.3
  Bottom Layer w0.254: 98.1,226 98.1,237.36 ; P1.6 98.1,237.36 ; P1.14 98.68,248.88 98.1,248.3 ; P1.20 98,255.04 ; P1.30 99.44,269.2 98,267.76 ; P1.34 98.2,274.28 97.92,274 ; P1.9 101.3,243.8 100.1,245 98.6,245 98.1,244.5 ; P1.25 100.78,262.9 98.6,262.9 98,262.3 ; P1.39 102,281.6 101,280.6 98.6,280.6 97.92,279.92 97.92,274 ; 103,225.7 104,226.7 104,229.3 105.1,230.4 v3(105.1,231.5) ; 104.2,224.4 113,224.4 ; v1(112.7,242.5) v1@118.6,242.5 ; C14.1@113.009,230.76 C12.1 119.409,230.76 119.509,230.66 119.509,226.491 119.8,226.2 128.7,226.2 129.24,225.66 Pultra.1 ; v1(118.7,242.4) 118.7,245.4 119.186,245.886 128.528,245.886 129.849,247.207 129.849,253.649 131.2,255 v2(131.2,255.4) ; v3(129.948,263.052) v2(137.4,263.052) ; v2@137.6,267.6 139.779,269.779 144.2,269.779 ; v3@142,236.7 145.3,236.7 149.38,240.78 Ppwr.4@151.7,240.78 ; v3(143.5,271.6) 143.5,276.092 v3(144.808,277.4) ; 145.3,279.1 v3@145.3,287 ; 97.92,274 97.92,267.84 98,267.76 ; 98,255.04 98,262.3 ; 98,255.04 98,248.4 98.1,248.3 ; 98,262.3 98,267.76 ; 98.1,237.36 98.1,244.5 ; 98.1,244.5 98.1,248.3
  other v3: 145,287.2 132.4,290.5
M1_P1: Pm.1 Pm.2 Pm.3 Pm.4 Q1.S Q2.D | length 33.6
  Top Layer w0.254: Q2.D@142.005,284.2 Q2.D@142.305,284.5 ; 148.7,277.8 148.74,277.76 ; 150.36,281.5 150.5,281.5
  Top Layer w1: Q1.S@133.065,284.2 134.335,284.2 135.605,284.2 Q2.D@142.005,284.2 ; Q2.D@142.305,284.5 145.7,284.5 148.7,281.5 ; 148.74,277.76 Pm.3 ; 150.5,281.5 Pm.2 ; Pm.4 150.58,275.22 148.7,277.1 148.7,277.8 148.7,281.5 ; Pm.1 150.36,281.5 148.7,281.5
M1_P2: Pm.5 Pm.6 Pm.7 Pm.8 Q3.S Q4.D | length 36.8
  Top Layer w1: Q3.S@132.56,275.5 133.83,275.5 135.1,275.5 136.2,275.5 136.4,275.7 137.96,275.7 139.23,275.7 140.5,275.7 141.77,275.7 143.5,275.7 146.52,272.68 ; Pm.8 150.04,265.06 149.06,266.04 149.06,268.28 ; Pm.7 149.74,267.6 149.06,268.28 ; Pm.6 149.06,270.14 ; Pm.5 146.52,272.68 ; 146.52,272.68 149.06,270.14 ; 149.06,268.28 149.06,270.14
NetC1_1: C1.1 C2.2 C3.2 F1.2 L1.1 U1.EN U1.VIN | length 51.9
  Top Layer w0.254: U1.EN 116.775,249.5 ; U1.VIN 116.775,249.5 ; C1.1@116.8,233.2 C1.1 117.2,233.4 118.5,234.7 v1(118.5,235.1) ; v1@118.3,237.2 116.3,237.2 115.5,238 115.5,245.2 116.006,245.706 117.806,245.706 119.4,247.3 119.4,248.8 118.7,249.5 116.775,249.5
  Top Layer w1: C3.2 C2.2 108.64,232.86 109.3,232.2 110.3,232.2 111.56,230.94 F1.2 113.4,229.8 C1.1@116.8,233.2 ; C1.1 122.9,233.2 123.646,232.454 123.976,232.454 124.33,232.1 L1.1
  Bottom Layer w0.254: v1@118.5,235.2 v1(118.5,237.4)
NetC4_1: C4.1 U1.SS | length 12.7
  Top Layer w0.254: C4.1 121.16,244.48 121.54,244.1 123.9,244.1 124.86,245.06 124.86,249.84 124.565,250.135 U1.SS
NetC7_2: C7.2 R3.2 | length 1.9
  Top Layer w0.254: R3.2 112.8,245.94 C7.2@112.84,245.9
NetC8_2: C8.2 R3.1 U1.COMP | length 7.1
  Top Layer w0.254: C8.2 111.68,249.64 R3.1 113.86,249.64 115.905,247.595 U1.COMP
NetD1_2: D1.2 L1.2 U1.SW | length 39.3
  Top Layer w0.254: U1.SW 124.505,251.405 125.3,252.2 125.3,254.4 126.6,255.7 D1.2 D1.2@127,255.35 ; L1.2 L1.2@136.596,233.204
  Top Layer w1: D1.2@127,255.35 127,237.1 128.5,235.6 134.2,235.6 L1.2@136.596,233.204
NetD2_1: D2.1 R4.2 | length 3.3
  Top Layer w0.254: v4(140,228.6) 140,230.05 D2.1
  Bottom Layer w0.254: v4@140,228.8 R4.2
NetD3_1: D3.1 R5.2 | length 3.1
  Top Layer w0.254: v5(143.2,228.6) D3.1
  Bottom Layer w0.254: v5@143.2,228.7 R5.2
NetD4_1: D4.1 R6.2 | length 3
  Top Layer w0.254: v4(146.2,228.6) D4.1
  Bottom Layer w0.254: v4@146.2,228.8 R6.2
NetD5_1: D5.1 R11.2 | length 3.7
  Top Layer w0.254: R11.2 129.3,285.6 130.3,286.6 D5.1
NetD6_1: D6.1 R12.2 | length 4.9
  Top Layer w0.254: R12.2 126.74,285.34 127.3,285.9 D6.1
NetD8_1: D8.1 R13.2 | length 5
  Top Layer w0.254: R13.2 122.2,284.9 124.3,287 D8.1
NetD9_1: D9.1 R14.2 | length 4.8
  Top Layer w0.254: R14.2 119.94,285.14 121.3,286.5 D9.1
NetF1_1: F1.1 P2.2 | length 2.8
  Top Layer w0.254: F1.1 F1.1@108.7,229.74
  Top Layer w1: P2.2 F1.1@108.7,229.74
NetF2_1: F2.1 Q1.D Q3.D | length 35.4
  Top Layer w0.254: v3@135.1,268.2 v3@135.3,268 ; 139.3,257.2 F2.1
  Top Layer w1: v3@135.1,268.2 135.1,269.9 133.83,269.9 132.56,269.9 131.29,269.9 130.2,269.9 129.4,270.7 129.4,277.5 130.5,278.6 131.795,278.6 133.065,278.6 134.335,278.6 Q1.D@135.605,278.6 ; v3(135.3,267.7) 135.3,261.8 136,261.1 136.097,261.1 137.7,259.497 v3@137.7,257.1 ; v3(137.7,256.8) 138.9,256.8 139.3,257.2
NetF2_2: F2.2 P3.2 P3.4 | length 7.3
  Top Layer w0.254: F2.2@142.76,257.06 F2.2
  Top Layer w1: P3.2 P3.4 140.46,254.76 F2.2@142.76,257.06
NetP4_3: P4.3 P5.1 R7.1 U2.SDA | length 23.8
  Top Layer w0.254: P4.3 116.36,267.8 120.7,267.8 121.12,267.38 U2.SDA ; P5.1 118.7,257.5 119.1,257.9 119.1,258.6 119.5,259 R7.1@120.782,259
  Bottom Layer w0.254: P5.1 117.4,257.5 118.4,258.5 v1@118.4,267.76
  other v1: 118.36,267.9
NetP4_5: P4.5 U2.CS | length 8.9
  Top Layer w0.254: P4.5 118.4,270.4 120.101,268.699 v1@120.4,268.699 ; U2.CS 122.12,266.72 122.36,266.96 v1(122.36,268.1)
  Bottom Layer w0.254: v1(120.66,268.7) 121.8,268.7 v1@122.2,268.3
NetP4_7: P4.7 P5.3 R8.1 U2.SCL | length 31.1
  Top Layer w0.254: P4.7 119.16,272.94 119.7,272.4 119.7,269.82 120.02,269.5 120.29,269.5 120.317,269.527 121.273,269.527 121.62,269.18 121.62,268.53 121.533,268.443 121.533,267.757 121.62,267.67 U2.SCL ; P5.3 116.84,260.04 118,261.2 R8.1
  Bottom Layer w0.254: P5.3 117.946,261.646 117.946,267.144 117.533,267.557 117.533,268.243 118.017,268.727 118.227,268.727 118.7,269.2 v1@118.7,272.9
  other v1: 118.66,272.9
NetPultra_2: Pultra.2 R9.2 | length 4.9
  Top Layer w0.254: R9.2 126.2,227.8 126.7,227.3 Pultra.2
NetR1_1: R1.1 R2.2 U1.FB | length 11.6
  Top Layer w0.254: R1.1 120.96,256.44 121.5,255.9 122.1,255.9 122.84,255.16 R2.2 122.84,254.02 120.6,251.78 120.6,249.16 120.895,248.865 U1.FB
SDO_IMU: P4.1 U2.SDO | length 4.3
  Top Layer w0.254: P4.1 117.72,265.32 118.05,265.65 U2.SDO
pads on no net: U2.NC

## Polygon pours and split planes (outlines as drawn)
GND on Bottom Layer (solid, pour order 2): 103.9,231.627 104,231.727 104,239.3 146.3,239.3 146.4,239.4 149.2,236.6 149.4,236.6 149.4,231.6 149.3,231.5 103.9,231.5
GND on Bottom Layer (solid, pour order 0): 97.8,224 97.8,231.7 97.7,231.8 153,231.8 153,223.9 152.9,224

## Other copper
Top Layer:
  rectangle net GND: 129.9,223.9 148.1,227.3
  rectangle net GND: 128.2,260.6 131.3,265.65
  rectangle net GND: 127.4,260.6 129.4,266.96
Bottom Layer:
  rectangle net GND: 120.2,283.3 133.4,292.7
  rectangle net GND: 120.6,282.9 146.2,288.3
  rectangle net GND: 129.395,224 138.4,226.491
  rectangle net GND: 103.3,223.9 114,225.9
  rectangle net GND: 146.4,278.1 149.4,284.2
  rectangle net GND: 145,277.1 147,288.4
  rectangle net GND: 143.2,269 149.4,278.1
  rectangle net GND: 112.7,223.9 119.9,229.7
  rectangle net GND: 103.3,226 104.5,229.4
  rectangle net GND: 97.8,224 104.5,226.3

## Silkscreen, mask and mechanical layers (free items; w line width, h text height)
Top Overlay:
  text "Programmable LEDs" at 104.9,287.4 h0.9
  text "+" at 149.2,282.5 h1
  text "+" at 149.3,279.7 h1
  text "+" at 149.34,277.3 h1
  text "+" at 149.2,274.78 h1
  text "-" at 149.2,272.2 h1
  text "-" at 149.34,269.7 h1
  text "-" at 149.4,267.1 h1
  text "-" at 149.4,264.6 h1
  text "IMU" at 123.6,262.7 h1
  text "MOSI" at 146.5,261.7 h1
  text "MISO" at 146.4,259.04 h1
  text "CS" at 147.8,256.5 h1
  text "SCLK" at 146.3,254 h1
  text "9V" at 137.1,252.9 h1
  text "SCL" at 147.2,251.4 h1
  text "5V" at 137.1,250.4 h1
  text "SDA" at 147.2,248.88 h1
  text "RXD" at 147.1,245.6 h1
  text "TXD" at 147,243.6 h1
  text "GND" at 147.1,240.1 h1
  text "3V3" at 147.1,237.8 h1
  text "5V" at 147.84,235.2 h1
  text "9V" at 148.04,232.9 h1
  text "3V3" at 138.9,224 h1
  text "9V" at 145.5,224 h1
  text "5V" at 142.4,223.9 h1
Top Solder:
  rectangle: 119.6,264.5 120.4,264.8
  rectangle: 121,263.2 121.3,263.8
  rectangle: 122.7,264 123.7,264.3
  rectangle: 119.6,265 120.4,265.3
  rectangle: 122,263.2 122.3,264.3
  rectangle: 121.5,263.2 121.8,264.3
  rectangle: 119.8,264 120.2,264.3
  rectangle: 119.7,265.5 120.2,265.8
  rectangle: 121,266 121.3,266.6
  rectangle: 121.5,266 121.8,266.6
  rectangle: 122,266 122.3,266.6
  rectangle: 123,264.5 123.8,264.8

## Text inside footprints (layer, text, board x,y; h text height)
P1: Top Overlay "39" at 102.508,283.932 h1.27 r90; Top Overlay "40" at 99.968,283.932 h1.27 r90; Top Overlay "2" at 99.968,231.1 h1.27 r90; Top Overlay "1" at 102.508,231.1 h1.27 r90
P3: Top Overlay "1" at 143.508,248.868 h1.27 r90; Top Overlay "2" at 140.968,248.36 h1.27 r90; Top Overlay "4" at 140.968,254.964 h1.27 r90; Top Overlay "3" at 143.508,254.964 h1.27 r90
P4: Top Overlay "2" at 114.268,262.78 h1.27 r90; Top Overlay "1" at 116.808,263.288 h1.27 r90; Top Overlay "7" at 116.808,274.464 h1.27 r90; Top Overlay "8" at 114.268,274.464 h1.27 r90
P5: Top Overlay "1" at 116.848,255.468 h1.27 r90; Top Overlay "2" at 114.308,254.96 h1.27 r90; Top Overlay "4" at 114.308,261.564 h1.27 r90; Top Overlay "3" at 116.848,261.564 h1.27 r90